# Altium PCB carte_ninja2026.PcbDoc
Units mm, origin at the board's own origin, x right, y up, seen from the top; angles counter-clockwise.
Board outline 79.38 x 52.07 mm, 2 copper layers (Top Layer, Bottom Layer); 35 components, 33 nets, 123 pads, 0 vias.
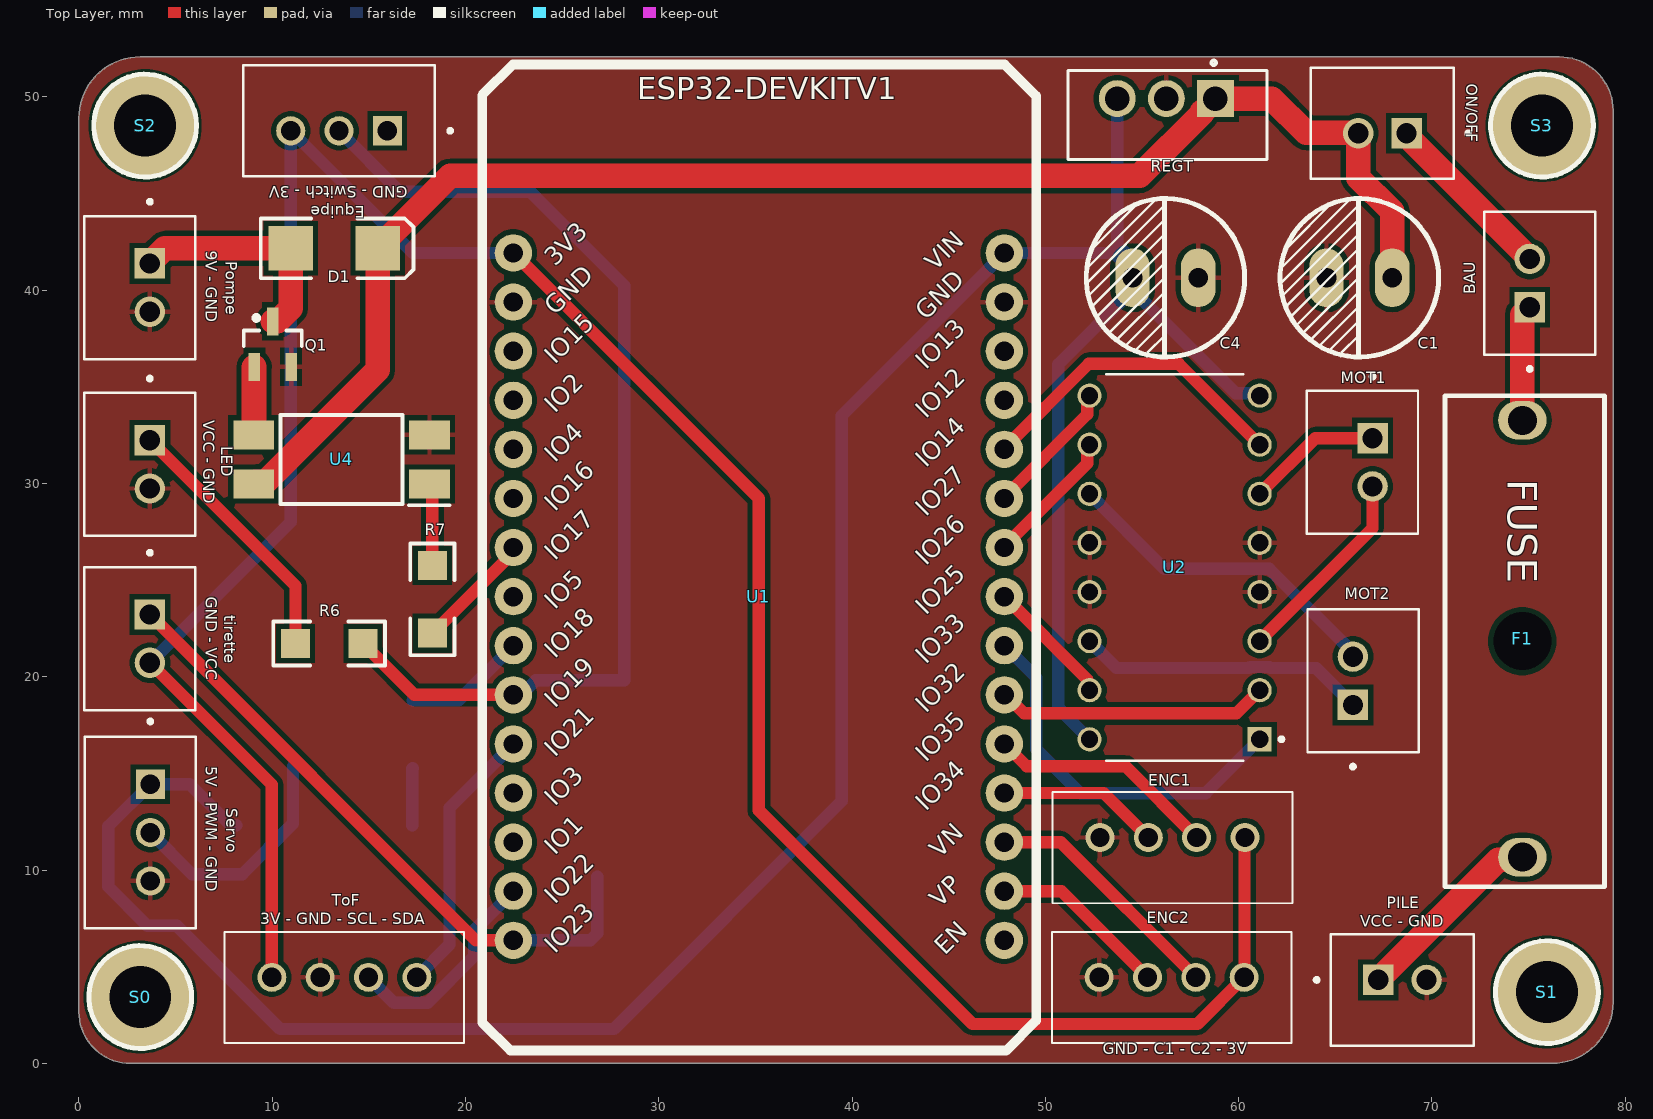
[diagram p0: Top Layer view]
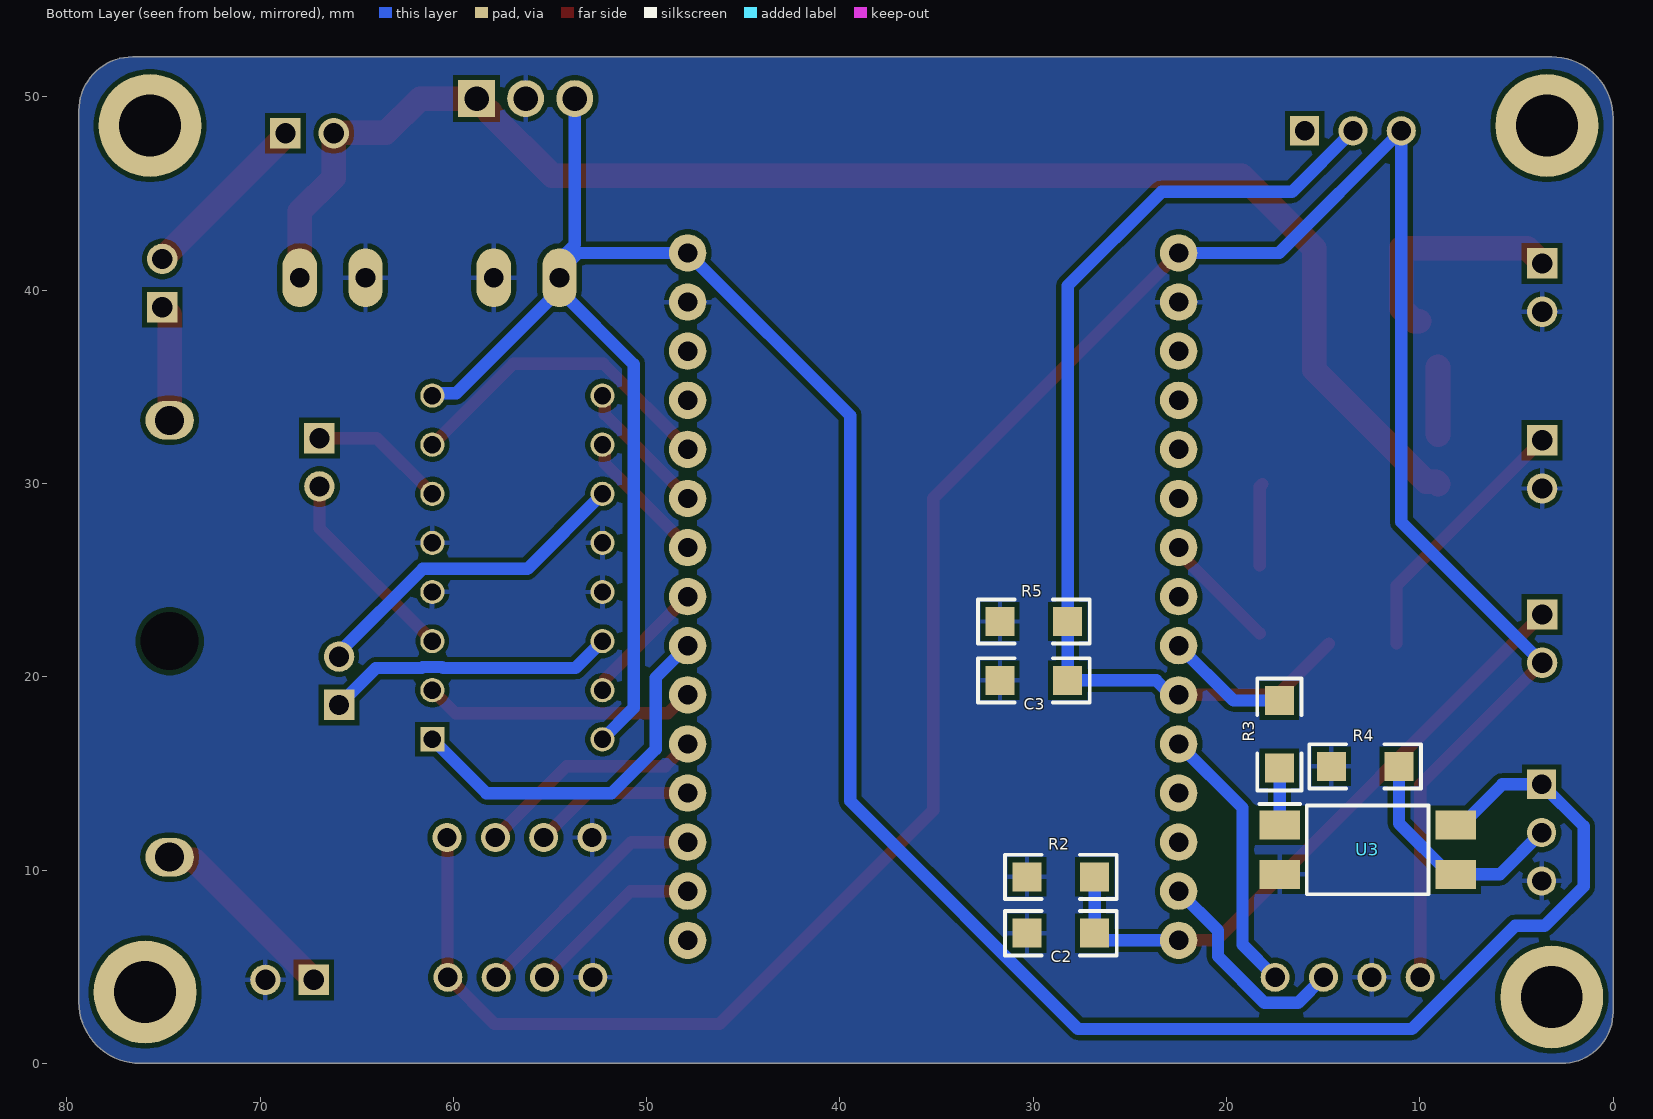
[diagram p1: Bottom Layer view, seen from below]

## Layer stack, top to bottom
Top Solder: solder mask 0.0102, Solder Resist, Dk 3.5
Top Layer: signal copper 0.0356
Dielectric 1: dielectric 0.32, FR-4, Dk 4.8
Bottom Layer: signal copper 0.0356
Bottom Solder: solder mask 0.0102, Solder Resist, Dk 3.5

## Board outline
2.667,0 76.2,0 ccw(c76.2,3.175) 79.375,3.175 79.375,49.276 ccw(c76.581,49.276) 76.581,52.07 3.175,52.07 ccw(c3.175,48.895) 0,48.895 0,2.667 ccw(c2.667,2.667)

## Design rules (kind name [scope] priority, off if disabled: settings)
Clearance [All] p1: gap=0.254 ignorepadtopadclearanceinfootprint=FALSE
PolygonConnect [All] p1: connectstyle=Relief reliefconductorwidth=0.254 reliefentries=4 polygonreliefangle="90 Angle" airgapwidth=0.254
RoutingVias [All] p1: holewidth=0.711 width=1.27 viastyle="Through Hole" minholewidth=0.711 minwidth=1.27 maxholewidth=0.711 maxwidth=1.27
SolderMaskExpansion [All] p1: expansion=0.102 istentingtop=FALSE
SupplyNets "Schematic Supply Nets_3" [InNet('3.3V')] p1: voltage=0.000
SupplyNets "Schematic Supply Nets_2" [InNet('VCC')] p2: voltage=0.000
SupplyNets "Schematic Supply Nets_1" [InNet('V_Bat')] p3: voltage=0.000
SupplyNets "Schematic Supply Nets" [InNet('GND')] p4: voltage=0.000
Width [All] p1: maxlimit=1.27 minlimit=0.254 preferedwidth=0.635 minimp=50.000000 maximp=50.000000 favimp=50.000000
30 further rules are at their usual default settings.

## Components (designator, comment, footprint, x,y, rotation, side; value= is the part's Value field where it differs from the comment)
BAU "Header 2H" JST_B2B-XH-A_(LF)(SN) 75.582,40.366 r270 top
C1 "35V" Condensateur 67.945,40.64 r180 top value=100uF
C2 "Cap" "Capacitor 1206" 28.575,6.731 r180 bottom value=1µF
C3 "Cap" "Capacitor 1206" 29.972,19.812 r180 bottom value=1µF
C4 "35V" Condensateur 57.912,40.64 r180 top value=100nF
D1 "LGE SS12" SMB 13.208,42.164 r0 top
ENC1 "Header 4" B4BXHALFSN 60.325,11.684 r180 top
ENC2 "Header 4" B4BXHALFSN 60.285,4.45 r180 top
Equipe "Header 3" JST_B3B-XH-A(LF)(SN) 13.462,48.768 r0 top
F1 "2A max" Fuse 74.676,33.268 r270 top
LED "Header 2H" JST_B2B-XH-A_(LF)(SN) 3.15,30.988 r90 top
MOT1 "Header 2H" JST_B2B-XH-A_(LF)(SN) 66.404,31.095 r90 top
MOT2 "Header 2H" JST_B2B-XH-A_(LF)(SN) 66.438,19.792 r270 top
ON/OFF "Header 2H" JST_B2B-XH-A_(LF)(SN) 67.437,48.641 r0 top
PILE "Header 2H" JST_B2B-XH-A_(LF)(SN) 68.473,3.793 r180 top
Pompe "Header 2H" JST_B2B-XH-A_(LF)(SN) 3.15,40.132 r90 top (schematic designator PUMP)
Q1 "MOSFET-N" SOT23_M 10.033,37.211 r90 top
R2 "Res2" "Resistor 1206" 28.575,9.652 r180 bottom value=10K
R3 "Res2" "Resistor 1206" 17.272,17.018 r270 bottom value=150
R4 "Res2" "Resistor 1206" 12.827,15.367 r180 bottom value=10K
R5 "Res2" "Resistor 1206" 29.972,22.86 r180 bottom value=10K
R6 "Res2" "Resistor 1206" 12.954,21.717 r180 top value=330
R7 "Res2" "Resistor 1206" 18.288,24.003 r90 top value=150
REGT "L7805ACV" TO254P460X1020X1945-3P 56.261,49.911 r270 top
S0 "Screw M3" "Screw M3" 3.175,3.429 r0 top
S1 "Screw M3" "Screw M3" 75.946,3.683 r0 top
S2 "Screw M3" "Screw M3" 3.429,48.514 r0 top
S3 "Screw M3" "Screw M3" 75.692,48.514 r0 top
Servo "Header 3" JST_B3B-XH-A(LF)(SN) 3.175,11.938 r90 top
tirette "Header 2H" JST_B2B-XH-A_(LF)(SN) 3.15,21.971 r90 top
ToF "Header 4" B4BXHALFSN 17.486,4.45 r180 top (schematic designator INFRA)
U1 "ESP32-DEVKITC-32D" MODULE_ESP32-DEVKITV1 35.179,26.924 r0 top
U2 "L293D" DIP880W50P254L2000H510Q16 56.687,25.654 r180 top
U3 "FOD817S" SOP254P1016X385-4N 12.7,11.049 r180 bottom
U4 "FOD817S" SOP254P1016X385-4N 13.589,31.242 r180 top

## Footprints (in the part's own frame and the unit in brackets; to place one, negate y for a bottom-side part, rotate by r counter-clockwise, add the part's x,y. Pads: shape width x height; smd on the part's side, far side on the other; paste and mask are expansions set on the pad)
B4BXHALFSN [mm]
  round 1.5 hole 1: 1(0,0) 2(2.5,0) 3(5,0) 4(7.5,0)
  silkscreen extent -2.45,-2.35 9.95,3.4, body extent -2.45,-2.35 9.95,3.4, height 7.52
"Capacitor 1206" [mm]
  rect 1.5x1.5 smd: 1(-1.75,0) 2(1.75,0)
  silkscreen extent -2.89,-1.14 2.89,1.14, body extent -1.97,-0.99 1.97,0.96, height 1.3
Condensateur [mil]
  oval 70x120 hole 40: 1(0,0) 2(133.86,0)
  silkscreen extent -94,-161 228,161, body extent -93,-160 227,160, height 500
DIP880W50P254L2000H510Q16 [mm]
  rect 1.25x1.25 / inner round 1.25 / far side rect 1.25x1.25 hole 0.9: 1(-4.4,8.89)
  round 1.25 hole 0.9: 2(-4.4,6.35) 3(-4.4,3.81) 4(-4.4,1.27) 5(-4.4,-1.27) 6(-4.4,-3.81) 7(-4.4,-6.35) 8(-4.4,-8.89) 9(4.4,-8.89) 10(4.4,-6.35) 11(4.4,-3.81) 12(4.4,-1.27) 13(4.4,1.27) 14(4.4,3.81) 15(4.4,6.35) 16(4.4,8.89)
  silkscreen extent -5.63,-10 3.55,10, body extent -10,-4.62 10,4.62, height 5.1
Fuse [mm] "Porte-fusible monté sur circuit 10 (UL) A, 6.3 (VDE) A, fusible Cartouche, 893-0574"
  round 2 hole 3: 0(11.43,0)
  oval 2x2.5 hole 1.5: 1(0,0) 2(22.6,0)
  silkscreen extent -1.27,-4 24.13,4.25, body extent -1.27,-4.29 24.13,4.29, height 11.41
JST_B2B-XH-A_(LF)(SN) [mm]
  rect 1.575x1.575 / inner round 1.575 / far side rect 1.575x1.575 hole 1.05: 1(1.25,-0.525)
  round 1.575 hole 1.05: 2(-1.25,-0.525)
  silkscreen extent -3.7,-2.88 4.54,2.88, body extent -3.7,-2.88 3.7,2.88, height 7
JST_B3B-XH-A(LF)(SN) [mm]
  rect 1.508x1.508 / inner round 1.508 / far side rect 1.508x1.508 hole 1: 1(2.5,-0.525)
  round 1.508 hole 1: 2(0,-0.525) 3(-2.5,-0.525)
  silkscreen extent -4.95,-2.88 5.85,2.88, body extent -4.95,-2.88 4.95,2.88, height 7
MODULE_ESP32-DEVKITV1 [mm]
  round 1.93 / inner round 1.524 / far side round 1.93 hole 1: 1(-12.7,15) 2(-12.7,12.46) 3(-12.7,9.92) 4(-12.7,7.38) 5(-12.7,4.84) 6(-12.7,2.3) 7(-12.7,-0.24) 8(-12.7,-2.78) 9(-12.7,-5.32) 10(-12.7,-7.86) 11(-12.7,-10.4) 12(-12.7,-12.94) 13(-12.7,-15.48) 14(-12.7,-18.02) 15(-12.7,-20.56) 16(12.7,-20.56) 17(12.7,-18.02) 18(12.7,-15.48) 19(12.7,-12.94) 20(12.7,-10.4) 21(12.7,-7.86) 22(12.7,-5.32) 23(12.7,-2.78) 24(12.7,-0.24) 25(12.7,2.3) 26(12.7,4.84) 27(12.7,7.38) 28(12.7,9.92) 29(12.7,12.46) 30(12.7,15)
  silkscreen extent -14.31,-26.26 14.35,24.75, body extent -14.22,-26.09 14.28,24.84, height 7.2
"Resistor 1206" [mm]
  rect 1.5x1.5 smd: 1(-1.75,0) 2(1.75,0)
  silkscreen extent -2.89,-1.14 2.89,1.14, body extent -1.98,-0.95 1.98,0.93, height 0.55
"Screw M3" [mm] "M3 iso Screw"
  round 5.32 hole 3.2 unplated: 0(0,0)
  silkscreen extent -2.66,-2.66 2.66,2.66
SMB [mm] "DO-214-AA/SMB; 2 C-Bend Leads; Body 5.3 x 3.6 mm, inc. leads (LxW)"
  rect 2.3x2.3 smd: 1(-2.25,0) 2(2.25,0)
  silkscreen extent -3.8,-1.55 4.1,1.55
SOP254P1016X385-4N [mm]
  rect 2.1x1.5 smd: 1(-4.55,1.27) 2(-4.55,-1.27) 3(4.55,-1.27) 4(4.55,1.27)
  silkscreen extent -5.6,-2.3 3.15,2.37, body extent -5.08,-2.3 5.08,2.3, height 3.85
SOT23_M [mm] "SOT23, 3-Leads, Body 2.9x1.3mm, Pitch 0.95mm, Lead Span 2.3mm - Reverse Pinning, IPC Low Density"
  rect 1.45x0.6 smd: 1(1.175,0) 2(-1.175,-0.95) 3(-1.175,0.95)
  silkscreen extent -0.1,-1.5 1.47,1.5, body extent -0.7,-1.5 0.7,1.5, height 1.1
TO254P460X1020X1945-3P [mm]
  rect 1.91x1.91 / inner round 1.91 / far side rect 1.91x1.91 hole 1.27: 1(0,2.54)
  round 1.91 hole 1.27: 2(0,0) 3(0,-2.54)
  silkscreen extent -1.96,-5.1 3.15,5.21, body extent -5.1,-2.25 5.1,2.25, height 19.68

## Part data
BAU LED MOT1 MOT2 ON/OFF PILE Pompe tirette: "Header, 2-Pin, Right Angle", LatestRevisionDate=17-Jul-2002, LatestRevisionNote="Re-released for DXP Platform.", Publisher="Altium Limited"
C1 C4: library part "Cap Pol1", "Polarized Capacitor (Radial)", LatestRevisionDate=17-Jul-2002, LatestRevisionNote="Re-released for DXP Platform.", PackageDescription="Polarized Capacitor (Radial); 2 Leads", PackageReference=RB7.6-15, Published=8-Jun-2000, Publisher="Altium Limited"
C2 C3: "Capacitor", LatestRevisionDate=17-Jul-2002, LatestRevisionNote="Re-released for DXP Platform.", PackageDescription="Radial Cap, Thru-Hole; 2 Leads; 0.3 in Pin Spacing", PackageReference=RAD-0.3, Published=8-Jun-2000, Publisher="Altium Limited"
D1: library part Diode, "Default Diode", Code_JEDEC=DO-214-AB, LatestRevisionDate=17-Jul-2002, LatestRevisionNote="Re-released for DXP Platform.", PackageDescription="DO-214-AB/SMC; 2 C-Bend Leads; Body 7.9 x 5.9 mm, inc. leads (LxW)", PackageReference=SMC, PackageVersion=Sep-1996, Published=8-Jun-2000, Publisher="Altium Limited"
ENC1 ENC2 ToF: "Header, 4-Pin", LatestRevisionDate=17-Jul-2002, LatestRevisionNote="Re-released for DXP Platform.", Publisher="Altium Limited"
Equipe Servo: "Header, 3-Pin", LatestRevisionDate=17-Jul-2002, LatestRevisionNote="Re-released for DXP Platform.", Publisher="Altium Limited"
F1: library part "Fuse 2", "Main Fuse", LatestRevisionDate=17-Jul-2002, LatestRevisionNote="Re-released for DXP Platform.", PackageDescription="Thru-Hole; 2 Leads", PackageReference=PIN-W2/E2.8, Published=8-Jun-2000, Publisher="Altium Limited"
Q1: "N-Channel MOSFET", LatestRevisionDate=17-Jul-2002, LatestRevisionNote="Re-released for DXP Platform.", PackageDescription="TO, Flat Index; 3 In-Line, Axial Leads; Body Dia. 4.6mm; Lead Dia. 0.5 mm (max)", PackageReference=E3, PackageVersion=1995/1996, Published=8-Jun-2000, Publisher="Altium Limited"
R2 R3 R4 R5 R6 R7: "Resistor", LatestRevisionDate=17-Jul-2002, LatestRevisionNote="Re-released for DXP Platform.", PackageDescription="Axial Device, Thru-Hole; 2 Leads; 0.4 in Pin Spacing", PackageReference=AXIAL-0.4, Published=8-Jun-2000, Publisher="Altium Limited"
REGT: "Linear Voltage Regulator IC Positive Fixed 1 Output 1.5A TO-220", Package="TO-220-3 STMicroelectronics", Check_prices=https://www.snapeda.com/parts/L7805ACV/STMicroelectronics/view-part/?ref=eda, MF=STMicroelectronics, MP=L7805ACV, SnapEDA_Link=https://www.snapeda.com/parts/L7805ACV/STMicroelectronics/view-part/?ref=snap
U1: "Eval Board For Esp-Wroom-32", Package=None, Availability=Unavailable, MF="Espressif Systems", MP=ESP32-DEVKITC-32D, Price=None, SnapEDA_Link=https://www.snapeda.com/parts/ESP32-DEVKITC-32D/Espressif%20Systems/view-part/?ref=snap
U2: "Bipolar Motor Driver - Parallel 16-PowerDIP", Package="DIP-16 STMicroelectronics", Availability="In Stock", Check_prices=https://www.snapeda.com/parts/L293D/STMicroelectronics/view-part/?ref=eda, MF=STMicroelectronics, MP=L293D, Price=None, Purchase-URL=https://pricing.snapeda.com/search/part/L293D/?ref=eda, SnapEDA_Link=https://www.snapeda.com/parts/L293D/STMicroelectronics/view-part/?ref=snap
U3 U4: library part Optoisolator1, "4-Pin Phototransistor Optocoupler", DatasheetVersion=Nov-2003, LatestRevisionDate=04-Mar-2005, LatestRevisionNote="Sch pins 3 & 4 Swapped.", PackageReference=DIP-4, Published=24-Mar-1999, Publisher="Altium Limited"

## Nets (pads, with @x,y where several pads share a name; then routed paths per layer and width w, separated by ;. In a path a pad name is that pad's centre, name@x,y a point inside that pad or via, vN(x,y) a via of type N, cw(c..) or ccw(c..) an arc to the next point about the centre after c; other vN are vias at no path point)
3.3V: ENC1.1 ENC2.1 Equipe.3 tirette.2 ToF.4 U1.1 | length 135.6
  Top Layer w0.635: tirette.2 9.986,14.41 ToF.4 ; U1.1 35.179,29.224 35.179,13.081 46.228,2.032 57.867,2.032 ENC2.1 60.305,4.47 60.305,11.664 ENC1.1
  Bottom Layer w0.635: tirette.2 10.962,28.008 Equipe.3 17.281,41.924 U1.1
C11: ENC1.3 U1.19 | length 8.4
  Top Layer w0.635: U1.19 53.025,13.984 ENC1.3
C12: ENC1.2 U1.20 | length 12
  Top Layer w0.635: U1.20 49.036,15.367 54.142,15.367 ENC1.2
C21: ENC2.3 U1.17 | length 9.3
  Top Layer w0.635: U1.17 50.831,8.904 ENC2.3
C22: ENC2.2 U1.18 | length 12.8
  Top Layer w0.635: U1.18 50.791,11.444 ENC2.2
"enable 1": U1.22 U2.1 | length 19.7
  Bottom Layer w0.635: U1.22 49.53,19.953 49.53,16.256 51.816,13.97 58.293,13.97 U2.1
"enable 2": U1.25 U2.9 | length 7.1
  Top Layer w0.635: U1.25 47.879,29.288 52.169,33.578 52.169,34.426 U2.9
Esp_Pump: R7.1 U1.7 | length 6.2
  Top Layer w0.635: R7.1 22.479,26.444 U1.7
Esp_PWM: R3.1 U1.9 | length 6.4
  Bottom Layer w0.635: R3.1 19.643,18.768 U1.9
GND: C1.2 C2.1 C3.1 C4.1 ENC1.4 ENC2.4 LED.2 PILE.2 Pompe.2 Q1.2 R2.1 R4.1 R5.1 REGT.2 Servo.3 ToF.3 U1.2 U1.29 U2.4 U2.5 U2.12 U2.13 U3.2 U4.2
I2C_SCL: ToF.2 U1.14 | length 11.2
  Bottom Layer w0.635: ToF.2 16.308,3.128 18.033,3.128 20.447,5.542 20.447,6.872 U1.14
I2C_SDA: ToF.1 U1.11 | length 14.1
  Bottom Layer w0.635: ToF.1 19.177,6.141 19.177,13.222 U1.11
M1: MOT1.2 U2.3 | length 10.4
  Top Layer w0.635: U2.3 66.929,27.686 MOT1.2
M2: MOT1.1 U2.6 | length 7
  Top Layer w0.635: U2.6 63.968,32.345 MOT1.1
M3: MOT2.2 U2.11 | length 17.2
  Bottom Layer w0.635: U2.11 56.171,25.581 61.583,25.581 65.913,21.25 MOT2.2
M4: MOT2.1 U2.14 | length 15
  Bottom Layer w0.635: U2.14 53.684,20.447 60.538,20.447 60.591,20.501 61.583,20.501 61.636,20.447 64.008,20.447 MOT2.1
NetBAU_1: BAU.1 F1.1 | length 6
  Top Layer w1.27: F1.1 74.676,38.735 BAU.1
NetBAU_2: BAU.2 ON/OFF.1 | length 9.1
  Top Layer w1.27: ON/OFF.1 68.84,47.963 68.84,47.833 BAU.2
NetD1_1: D1.1 Pompe.1 Q1.1 | length 11.9
  Top Layer w1.27: Pompe.1 4.457,42.164 D1.1 10.958,39.066 10.278,38.386 Q1.1
NetF1_2: F1.2 PILE.1 | length 10.1
  Top Layer w1.27: PILE.1 73.433,10.528 74.536,10.528 F1.2
NetLED_1: LED.1 R6.2 | length 13.6
  Top Layer w0.635: LED.1 11.204,24.709 R6.2
NetQ1_2: Q1.3 U4.3 | length 3.5
  Top Layer w1.27: U4.3 9.061,32.534 9.061,36.014 Q1.3
NetR3_2: R3.2 U3.1 | length 3
  Bottom Layer w0.635: U3.1 17.25,15.246 R3.2
NetR7_2: R7.2 U4.1 | length 4.3
  Top Layer w0.635: U4.1 18.288,29.823 R7.2
Opt_PWM: R4.2 Servo.2 U3.3 | length 12.3
  Bottom Layer w0.635: Servo.2 5.859,9.779 U3.3 8.45,9.779 11.077,12.406 R4.2
"Sens1 M1": U1.21 U2.2 | length 14.1
  Top Layer w0.635: U1.21 47.942,19.064 48.899,18.107 59.89,18.107 U2.2
"Sens1 M2": U1.24 U2.10 | length 7.1
  Top Layer w0.635: U1.24 47.879,26.748 52.169,31.038 52.169,31.886 U2.10
"Sens2 M1": U1.26 U2.7 | length 16.8
  Top Layer w0.635: U1.26 47.879,31.828 52.246,36.195 56.896,36.195 U2.7
"Sens2 M2": U1.23 U2.15 | length 6.7
  Top Layer w0.635: U1.23 52.169,19.854 52.169,19.422 U2.15
switch_gd: C3.2 Equipe.2 R5.2 R6.1 U1.10 | length 53.4
  Top Layer w0.635: R6.1 17.357,19.064 U1.10
  Bottom Layer w0.635: Equipe.2 16.62,45.085 23.368,45.085 28.222,40.231 R5.2 C3.2 23.635,19.812 22.887,19.064 U1.10
tirette: C2.2 R2.2 tirette.1 U1.15 | length 33.2
  Top Layer w0.635: tirette.1 20.532,6.364 U1.15
  Bottom Layer w0.635: U1.15 26.458,6.364 C2.2 R2.2
V_Bat: C1.1 D1.2 ON/OFF.2 REGT.1 U4.4 | length 78.1
  Top Layer w1.27: U4.4 9.154,30.087 9.671,30.087 15.458,35.874 D1.2 19.207,45.913 54.871,45.913 58.105,49.147 58.105,49.215 REGT.1 61.715,49.911 63.494,48.132 66.171,48.132 ON/OFF.2 66.187,45.827 67.945,44.069 C1.1
VCC: C4.2 REGT.3 Servo.1 U1.30 U2.8 U2.16 U3.4 | length 140.5
  Bottom Layer w0.635: U3.4 7.85,12.319 5.731,14.438 Servo.1 1.524,12.262 1.524,9.144 3.556,7.112 5.08,7.112 10.414,1.778 27.68,1.778 39.471,13.569 39.471,33.516 U1.30 53.554,41.924 54.512,40.966 54.512,41.584 53.721,42.375 REGT.3 ; U2.16 50.673,18.378 50.673,36.166 C4.2@54.512,40.005 ; C4.2 C4.2@54.512,40.005 ; U2.8 60.969,34.662 59.855,34.662 C4.2@54.512,40.005
pads on no net: Equipe.1 F1.0 S0.0 S1.0 S2.0 S3.0 U1.3 U1.4 U1.5 U1.6 U1.8 U1.12 U1.13 U1.16 U1.27 U1.28

## Polygon pours and split planes (outlines as drawn)
GND on Top Layer "GND_L01_P000" (solid, remove dead copper, pour order 0): 2.667,0 76.2,0 ccw(c76.2,3.175) 79.375,3.175 79.375,49.276 ccw(c76.581,49.276) 76.581,52.07 3.175,52.07 ccw(c3.175,48.895) 0,48.895 0,2.667 ccw(c2.667,2.667)
GND on Bottom Layer "GND_L02_P001" (solid, remove dead copper, pour order 1): 2.667,0 76.2,0 ccw(c76.2,3.175) 79.375,3.175 79.375,49.276 ccw(c76.581,49.276) 76.581,52.07 3.175,52.07 ccw(c3.175,48.895) 0,48.895 0,2.667 ccw(c2.667,2.667)

## Silkscreen, mask and mechanical layers (free items; w line width, h text height)
Top Overlay:
  text "GND - Switch - 3V" at 17.018,45.582 h1 r180
  text "9V - GND" at 6.361,42.037 h1 r270
  text "VCC - GND" at 6.234,33.273 h1 r270
  text "GND - VCC" at 6.361,24.13 h1 r270
  text "5V - PWM - GND" at 6.361,15.367 h1 r270
  text "3V - GND - SCL - SDA" at 9.398,6.996 h1
  text "VCC - GND" at 66.295,6.869 h1
  text "GND - C1 - C2 - 3V" at 52.959,0.265 h1
Mechanical 1:
  lines w0.254: 0,2.032 ccw(c2.413,2.413) 2.794,0 75.946,0 ccw(c76.073,3.302) 79.375,3.175 79.375,49.403 ccw(c76.708,49.403) 76.708,52.07 3.556,52.07 ccw(c3.365,48.704) 0,48.895 0,2.032

## Text inside footprints (layer, text, board x,y; h text height)
F1: Top Overlay "FUSE" at 73.914,30.22 h1.52 r270
U1: Top Overlay "ESP32-DEVKITV1" at 28.889,49.494 h1.97; Top Overlay "3V3" at 24.849,40.984 h1.57 r45; Top Overlay "GND" at 24.849,38.444 h1.57 r45; Top Overlay "IO15" at 24.849,35.904 h1.57 r45; Top Overlay "IO2" at 24.849,33.364 h1.57 r45; Top Overlay "IO4" at 24.849,30.824 h1.57 r45; Top Overlay "IO16" at 24.849,28.284 h1.57 r45; Top Overlay "IO17" at 24.849,25.744 h1.57 r45; Top Overlay "IO5" at 24.849,23.204 h1.57 r45; Top Overlay "IO18" at 24.849,20.664 h1.57 r45; Top Overlay "IO19" at 24.849,18.124 h1.57 r45; Top Overlay "IO21" at 24.849,15.584 h1.57 r45; Top Overlay "IO3" at 24.849,13.044 h1.57 r45; Top Overlay "IO1" at 24.849,10.504 h1.57 r45; Top Overlay "IO22" at 24.849,7.964 h1.57 r45; Top Overlay "IO23" at 24.849,5.424 h1.57 r45; Top Overlay "VIN" at 44.549,40.724 h1.57 r45; Top Overlay "GND" at 44.059,38.174 h1.57 r45; Top Overlay "IO13" at 44.059,35.634 h1.57 r45; Top Overlay "IO12" at 44.059,33.094 h1.57 r45; Top Overlay "IO14" at 44.059,30.554 h1.57 r45; Top Overlay "IO27" at 44.059,28.014 h1.57 r45; Top Overlay "IO26" at 44.059,25.474 h1.57 r45; Top Overlay "IO25" at 44.059,22.934 h1.57 r45; Top Overlay "IO33" at 44.059,20.394 h1.57 r45; Top Overlay "IO32" at 44.059,17.854 h1.57 r45; Top Overlay "IO35" at 44.059,15.314 h1.57 r45; Top Overlay "IO34" at 44.059,12.774 h1.57 r45; Top Overlay "VN" at 44.779,10.344 h1.57 r45; Top Overlay "VP" at 44.779,7.804 h1.57 r45; Top Overlay "EN" at 45.029,5.334 h1.57 r45